# EAGLE board Volterra Extruder_0 Board (EAGLE 9.1.3)
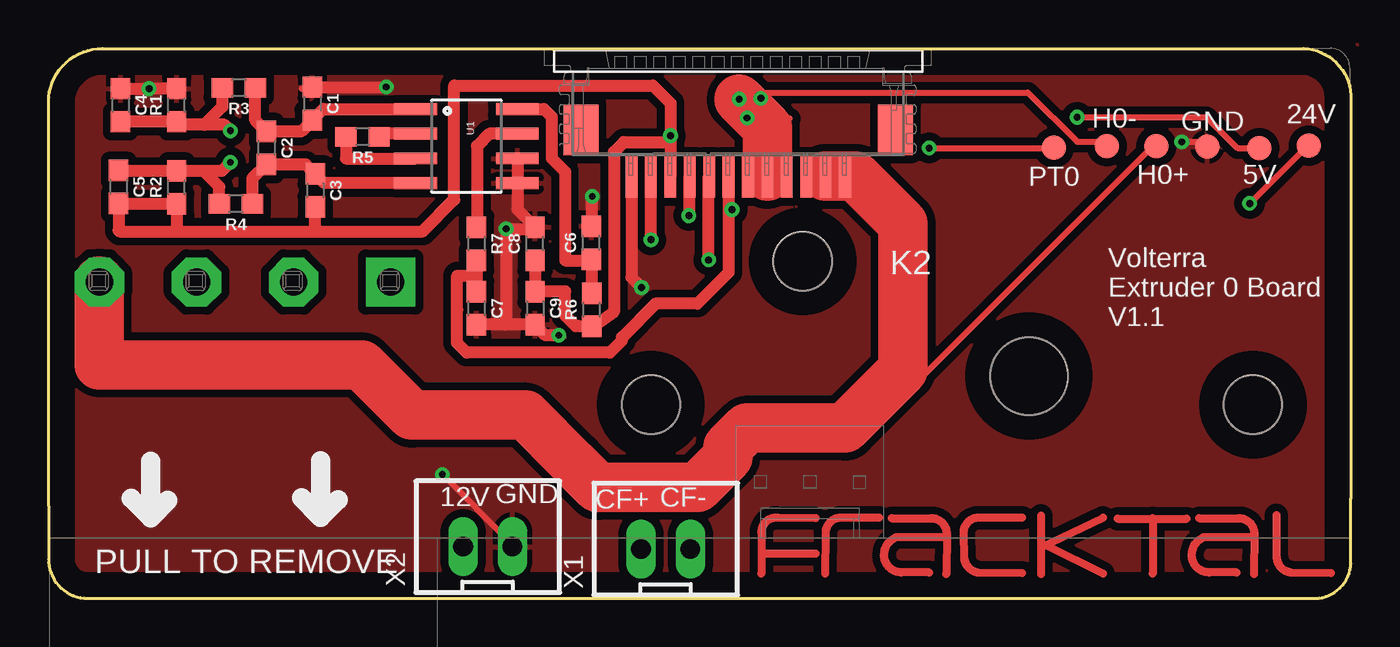
[diagram p0: board, top side]
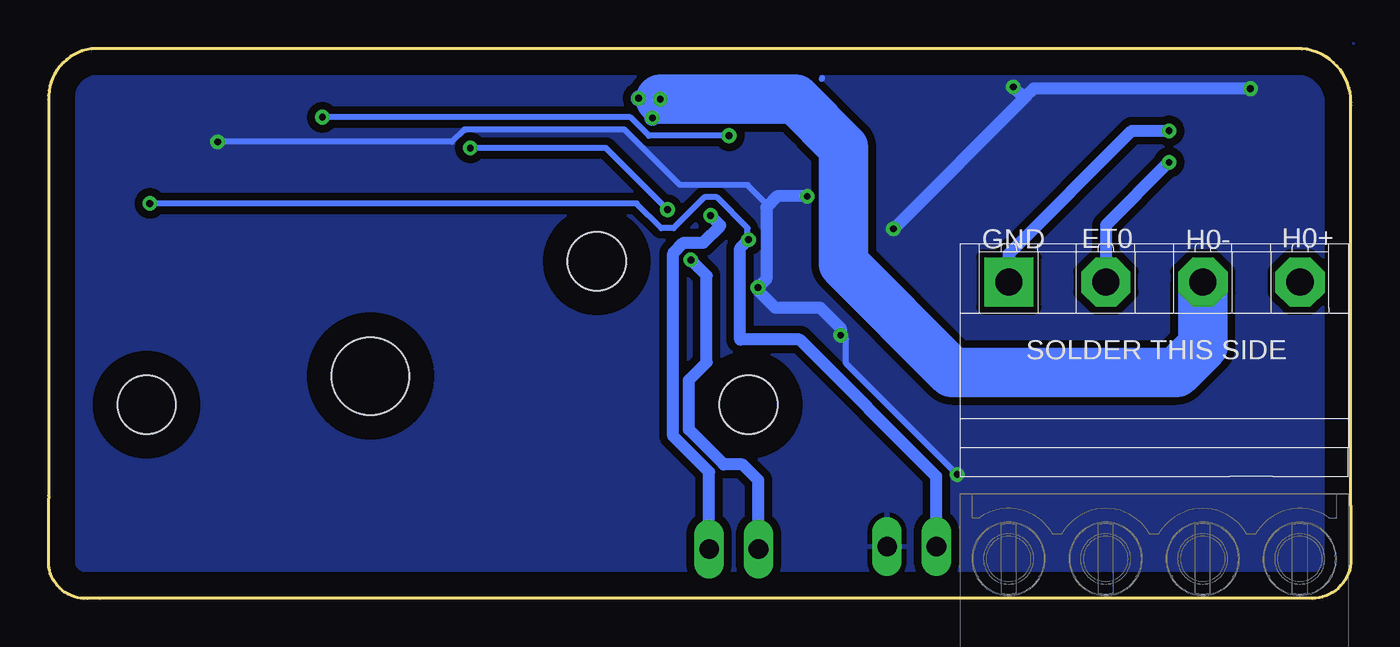
[diagram p1: board, bottom side, seen from below]

Size 67.11 x 28.35 mm. Coordinates in mm from the lower left corner, seen from the top.
Outline: 0,25.58 arc-90 2.77,28.35 64.67,28.35 arc-90 67.11,25.71 67.11,5.31 67.11,5.16 67.11,1.8 arc-90 65.1,0 64.47,0 2.01,0 arc-90 0,2.03 0,4.78 0,25.43 0,25.58
Copper layers (1*16): Top 0.035mm / dielectric 1.5mm / Bottom 0.035mm
Design rules "LionCircuits": minimum track width 8mil, minimum drill 0.35mm, track to track 8mil, track to pad 8mil, pad to pad 8mil, via to via 8mil, smd to smd 8mil, copper to edge 50mil, drill to drill 10mil, minimum pad ring 10mil, minimum via ring 8mil, stop-mask expansion 4mil, vias tented up to drill 0mil, thermal gap 10mil
Net classes: 0 default: width 0.305 mm
Holes 3 mm at 38.86,17.37 31.04,9.98 62.05,9.98
Holes 4 mm at 50.52,11.46

## Footprints (pad centres in the part's own frame; a part is rotated, then mirrored left to right if it is on the bottom)
0603 = smd 1.1 x 1: 1 -0.85,0; 2 0.85,0
TERMINALBLOCK/TOYO/4PIN/5MMPITCH = drill 1.4 pad 2.54 square: 1 0,0 | drill 1.4 pad 2.54 octagon: 2 5,0; 3 10,0; 4 15,0
68611214122 = smd 0.6 x 2.2: 1 -8.5,1.1; 2 -7.5,1.1; 3 -6.5,1.1; 4 -5.5,1.1; 5 -4.5,1.1; 6 -3.5,1.1; 7 -2.5,1.1; 8 -1.5,1.1; 9 -0.5,1.1; 10 0.5,1.1; 11 1.5,1.1; 12 2.5,1.1 | smd 1.8 x 2.6: Z1 -11.1,-1.3; Z2 5.1,-1.3
PAD.03X.05 = smd 1.27 x 1.27: P$1 0,0
SOIC-8 = smd 0.61 x 2.21: 1 -1.905,-2.616; 2 -0.635,-2.616; 3 0.635,-2.616; 4 1.905,-2.616; 5 1.905,2.616; 6 0.635,2.616; 7 -0.635,2.616; 8 -1.905,2.616
JST-XH-02-PACKAGE-LONG-PAD = drill 1.016 long: 1 -1.27,0; 2 1.27,0

## Placement (x,y rotation side)
C1  100nF  [0603]  13.59,25.5 270 top
C2  1uF  [0603]  11.23,23.22 270 top
C3  100nF  [0603]  13.74,21.03 270 top
C4  100nF  [0603]  3.71,25.43 270 top
C5  100nF  [0603]  3.61,21.21 270 top
C6  100nF  [0603]  27.97,18.34 90 top
C7  10nF  [0603]  22.05,14.96 270 top
C8  10uF  [0603]  25.07,18.29 90 top
C9  10uF  [0603]  25.07,14.96 270 top
J1  TERMINALBLOCK/4PIN/5MMPITCH  [TERMINALBLOCK/TOYO/4PIN/5MMPITCH]  17.63,16.31 0 bottom
K2  68611214122  [68611214122]  32.54,22.86 180 top
R1  2.2k  [0603]  6.6,25.43 90 top
R2  2.2k  [0603]  6.6,21.18 90 top
R3  10k  [0603]  9.8,26.32 180 top
R4  10k  [0603]  9.65,20.35 180 top
R5  5.49k  [0603]  16.18,23.8 180 top
R6  100R  [0603]  27.99,14.89 90 top
R7  100R  [0603]  22.05,18.29 270 top
TP1  TEST-POINT3X5  [PAD.03X.05]  57.07,23.32 0 top
TP2  TEST-POINT3X5  [PAD.03X.05]  54.53,23.32 0 top
TP5  TEST-POINT3X5  [PAD.03X.05]  51.79,23.24 0 top
TP6  TEST-POINT3X5  [PAD.03X.05]  64.92,23.34 0 top
TP7  TEST-POINT3X5  [PAD.03X.05]  59.72,23.29 0 top
TP8  TEST-POINT3X5  [PAD.03X.05]  62.38,23.22 0 top
U1  INA826SOIC-08  [SOIC-8]  21.54,23.32 270 top
U$1  [FRACKTALLOGO]  48.72,1.17 0 top
X1  CF  [JST-XH-02-PACKAGE-LONG-PAD]  31.8,2.54 0 top
X2  AOF  [JST-XH-02-PACKAGE-LONG-PAD]  22.63,2.67 0 top

## Library data of the parts
C1-C9 = SparkFun-Capacitors; PROD_ID: CAP-00810
J1 U$1 = FracktalWorks_Eagle_Library
K2 = Wurth_Elektronik_Electromechanic_FPC_Connectors_&_Flat_Flexible_Cable_rev15b
R1-R7 = SparkFun-Resistors; PROD_ID: RES-09119
TP1 TP2 TP5-TP8 = SparkFun-Connectors
U1 = smd-footprints
X1 X2 = Rembrandt Electronics - JST XH Connectors v1-0

## Nets
5V: C3.2 C5.2 C8.1 C9.1 K2.10 R2.1 R6.1 TP8.P$1
24V: K2.11 TP6.P$1 X2.1
CF+: K2.8 X1.1
CF-: K2.9 X1.2
GND: C1.1 C4.1 C6.2 C7.2 C8.2 C9.2 K2.12 R1.2 TP7.P$1 U1.5 U1.6 X2.2
H0+: J1.4 K2.1 K2.2 K2.3 TP1.P$1
H0-: J1.3 K2.4 K2.5 K2.6 TP2.P$1
IN+: C5.1 J1.2 R2.2 R4.2
IN-: C4.2 J1.1 R1.1 R3.2
N$1: R5.1 U1.2
N$2: R5.2 U1.3
N$3: C1.2 C2.1 R3.1 U1.1
N$4: C2.2 C3.1 R4.1 U1.4
N$5: C6.1 R6.2 U1.8
N$8: R7.1 U1.7
PT0: C7.1 K2.7 R7.2 TP5.P$1

## Tracks (layer width: path | path; a pad name or v marks a point on that pad's centre or on a via)
5V  (via drill 0.35)
  Top 0.305: 27.37,14.04 27.53,14.07 27.79,14.07 R6.1 28.14,14.04 | 62.33,23.22 TP8.P$1 | 62.33,23.22 TP8.P$1 | 62.33,23.22 TP8.P$1 | v53,24.8 59.66,24.8 61.25,23.22 62.2,23.22 TP8.P$1 | 32.05,23.85 v32.04,23.85 32.04,23.53 32.04,23.52
  Top 0.61: C8.1 C9.1 25.08,15.83 26.62,15.83 26.62,14.58 27.17,14.04 27.37,14.04 | 6.6,18.92 3.66,18.92 3.61,18.97 C5.2 6.58,20.36 R2.1 6.6,18.92 | 6.6,18.92 13.87,18.92 | 13.87,18.92 13.89,18.95 13.74,19.1 C3.2 | 13.87,18.92 19.28,18.92 20.9,20.55 20.9,26.44 31.14,26.44 32.05,25.53 32.05,23.85 | K2.10 32.05,21.78 32.05,23.22 32.05,23.52 32.04,23.52 29.64,23.52 29.13,23.01 29.13,14.77 28.14,14.04
  Bottom 0.305: v53,24.8 37.12,24.8 36.17,23.85 v32.04,23.85
24V  (via drill 0.35)
  Top 0.305: v61.89,20.36 64.74,23.22 TP6.P$1
  Top 0.61: v31.04,18.49 K2.11
  Bottom 0.305: v61.89,20.36 36.8,20.36 35.53,19.09 34.9,19.09 33.31,20.68 32.68,20.68 31.09,19.09 31.09,18.77 v31.04,18.49
  Bottom 0.61: X2.1 21.36,6.3 28.4,13.34 31.47,13.34 31.47,18.06 v31.04,18.49
CF+  (via drill 0.35)
  Top 0.61: v34.01,17.45 34.01,21.73 K2.8
  Bottom 0.61: X1.1 30.53,6.1 31.34,6.91 32.31,6.91 34.11,8.71 34.11,11.26 33.2,12.17 33.2,16.64 v34.01,17.45
CF-  (via drill 0.35)
  Top 0.61: v32.99,19.74 33.04,19.78 K2.9
  Bottom 0.61: v32.99,19.74 32.49,19.23 33.38,18.34 34.38,18.34 34.93,17.79 34.93,8.37 33.07,6.52 X1.2
GND  (via drill 0.35)
  Top 0.305: 13.56,26.26 C1.1 | 13.56,26.26 13.51,26.28 | 13.56,26.26 C1.1 | 13.56,26.26 13.51,26.28 | 13.56,26.26 C1.1 | 13.56,26.26 13.51,26.28 | 13.31,26.26 C1.1 | 13.31,26.26 13.31,26.28 | 13.31,26.26 C1.1 | 13.31,26.26 13.31,26.28 | 13.31,26.26 C1.1 | 13.31,26.26 13.31,26.28 | 13.31,26.26 C1.1 | 13.31,26.26 13.31,26.28 | 13.31,26.26 C1.1 | 13.31,26.26 13.31,26.28 | 13.56,26.26 C1.1 | 13.56,26.26 13.51,26.28 | 13.56,26.26 C1.1 | 13.56,26.26 13.51,26.28 | 13.56,26.26 C1.1 | 13.56,26.26 13.51,26.28 | 13.31,26.26 C1.1 | 13.31,26.26 13.31,26.28 | 13.31,26.26 C1.1 | 13.31,26.26 13.31,26.28 | 13.31,26.26 C1.1 | 13.31,26.26 13.31,26.28 | 13.31,26.26 C1.1 | 13.31,26.26 13.31,26.28 | 13.56,26.26 C1.1 | 13.56,26.26 13.51,26.28 | 13.56,26.26 C1.1 | 13.56,26.26 13.51,26.28 | 13.31,26.26 C1.1 | 13.31,26.26 13.31,26.28 | 13.31,26.26 C1.1 | 13.31,26.26 13.31,26.28 | 13.31,26.26 C1.1 | 13.31,26.26 13.31,26.28 | 13.31,26.26 C1.1 | 13.31,26.26 13.31,26.28 | 13.31,26.26 C1.1 | 13.31,26.26 13.31,26.28 | 13.06,26.26 13.06,26.28 | 13.06,26.26 13.06,26.28 | 13.06,26.26 13.06,26.28 | 13.06,26.26 13.06,26.28 | 13.06,26.26 13.06,26.28 | 13.06,26.26 13.06,26.28 | 13.06,26.26 13.06,26.28 | 13.06,26.26 13.06,26.28 | 13.56,26.26 C1.1 | 13.56,26.26 13.51,26.28 | 13.56,26.26 C1.1 | 13.56,26.26 13.51,26.28 | 13.56,26.26 C1.1 | 13.56,26.26 13.51,26.28 | 13.56,26.26 C1.1 | 13.56,26.26 13.51,26.28 | 13.56,26.26 C1.1 | 13.56,26.26 13.51,26.28 | 13.56,26.26 C1.1 | 13.56,26.26 13.51,26.28 | 13.56,26.26 C1.1 | 13.56,26.26 13.51,26.28 | 13.56,26.26 C1.1 | 13.56,26.26 13.51,26.28 | 13.56,26.26 C1.1 | 13.56,26.26 13.51,26.28 | 13.56,26.26 C1.1 | 13.56,26.26 13.51,26.28 | 13.56,26.26 C1.1 | 13.56,26.26 13.51,26.28 | 13.56,26.26 C1.1 | 13.56,26.26 13.51,26.28
  Top 0.305: 13.31,26.26 C1.1 | 13.31,26.26 13.31,26.28 | 13.31,26.26 C1.1 | 13.31,26.26 13.31,26.28 | 13.31,26.26 C1.1 | 13.31,26.26 13.31,26.28 | 13.31,26.26 C1.1 | 13.31,26.26 13.31,26.28 | 13.31,26.26 C1.1 | 13.31,26.26 13.31,26.28 | v58.39,23.53 59.66,23.53 TP7.P$1 | v20.29,6.39 23.79,2.9 X2.2
  Top 0.61: 23.52,14.11 C9.2 25.62,13.56 v26.29,13.56 | 23.52,14.11 C7.2 | U1.6 U1.5 24.16,20.05 C8.2 24.98,19.05 v23.57,19.05 23.57,14.16 23.52,14.11 | C4.1 v5.18,26.28 R1.2 | K2.12 30.04,16.55 v30.56,16.03 | C1.1 17.39,26.35 v17.4,26.37 | v28.02,20.73 28.02,19.24 C6.2
  Bottom 0.305: v58.39,23.53 46.33,23.53 45.69,24.17 37.44,24.17 34.58,21.31 31.09,21.31 30.14,20.36 30.12,20.17 | v20.29,6.39 26.01,12.1 26.01,13.37 v26.29,13.56 | 27.28,26.77 27.23,26.82 27.28,26.77
  Bottom 0.61: v5.18,26.28 16.35,26.28 16.74,25.88 | 16.74,25.88 v23.57,19.05 | v26.29,13.56 26.29,13.92 27.36,14.99 27.97,14.99 29.67,14.99 30.56,15.88 v30.56,16.03 30.12,16.46 30.12,20.17 29.57,20.73 v28.02,20.73 | v17.4,26.37 16.92,25.88 16.74,25.88
  pour Top (isolate 0.406): -0.15,28.58 67.44,28.58 67.44,0.05 -0.15,0.05
  pour Bottom (isolate 0.406): -0.15,28.6 67.34,28.6 67.34,0.08 -0.15,0.08
H0+
  Top 0.305: TP1.P$1 56.81,23.22 45.06,11.47 44.03,11.77
  Top 0.61: K2.3 K2.2 K2.1
  Top 2.54: K2.2 41.59,21.76 43.23,20.12 44.03,19.32 44.03,11.77 41.05,8.79 35.99,8.79 35,7.8 35,7.29 33.43,5.72 28.3,5.72 27,7.01 27,7.02 24.57,9.45 18.72,9.45 16.13,12.04 2.62,12.04 2.62,16.36 2.63,16.35 J1.4
H0-  (via drill 0.35)
  Top 0.305: TP2.P$1 54.27,23.53 53,23.53 50.46,26.07 36.8,26.07 v36.7,25.78 | 38.2,24.74 37.04,24.28 38.2,24.74
  Top 0.61: K2.6 K2.5 K2.4
  Top 2.54: K2.5 37.04,24.28 v35.59,25.73
  Bottom 0.813: v36.7,25.78 35.64,25.78 | 35.64,25.78 v35.59,25.73 | v35.99,24.77 35.99,25.43 35.64,25.78
  Bottom 2.54: v35.59,25.73 28.63,25.73 26.14,23.24 26.14,19.13 26.14,17.25 20.55,11.66 8.99,11.66 7.62,13.03 7.63,13.04 J1.3
IN+  (via drill 0.35)
  Top 0.61: R4.2 8.8,21.22 7.99,22.03 | 7.99,22.03 7.72,22.03 R2.2 3.63,22.03 C5.1 | v9.37,22.48 8.93,22.03 7.99,22.03
  Bottom 0.61: v9.37,22.48 12.62,19.23 J1.2
IN-  (via drill 0.35)
  Top 0.61: R3.2 8.95,25.34 8.03,24.41 | 8.03,24.41 6.77,24.41 R1.1 C4.2 | v9.37,24.11 9.07,24.41 8.03,24.41
  Bottom 0.305: 17.63,17.76 17.63,17.63
  Bottom 0.61: 17.63,17.76 11.28,24.11 v9.37,24.11 | 17.63,17.63 J1.1
N$1
  Top 0.61: U1.2 17.18,23.95 R5.1
N$2
  Top 0.61: R5.2 15.33,22.68 U1.3
N$3
  Top 0.61: U1.1 14.16,25.22 C1.2 13,24.07 C2.1 10.65,24.64 R3.1
N$4
  Top 0.61: R4.1 10.5,21.64 C2.2 13.26,22.37 C3.1 14.21,21.41 U1.4
N$5
  Top 0.61: U1.8 25.53,25.22 25.92,24.83 25.92,22.7 26.62,22 26.62,17.43 27.9,17.43 C6.1 27.97,15.76 R6.2
N$8
  Top 0.61: U1.7 22.71,23.95 22.07,23.32 22.07,19.3 21.91,19.14 R7.1
PT0  (via drill 0.35)
  Top 0.305: v45.38,23.22 51.73,23.22 TP5.P$1 | v35.22,20.04 35.04,19.91
  Top 0.61: R7.2 22.05,16.69 | 22.05,16.69 C7.1 | K2.7 35.04,19.91 35.04,16.8 33.43,15.19 31.27,15.19 29.54,13.46 29.54,13.29 28.93,12.67 21.54,12.67 21.04,13.17 21.04,14.87 21.06,14.89 21.06,16.64 22,16.64 22.05,16.69
  Bottom 0.305: v45.38,23.22 38.39,23.22 v35.22,20.04

## Text on the board
tNames: H0- | GND | 24V | PT0 | H0+ | 5V | Volterra / Extruder 0 Board / V1.1 | 12V | GND | CF+ | CF- | PULL TO REMOVE
bNames: H0+ | H0- | ET0 | GND | SOLDER THIS SIDE
bValues: Design By Vijay Raghav Varada / Fracktal Works